# EAGLE board Striain_Gauge_Circuit (EAGLE 9.3.0)
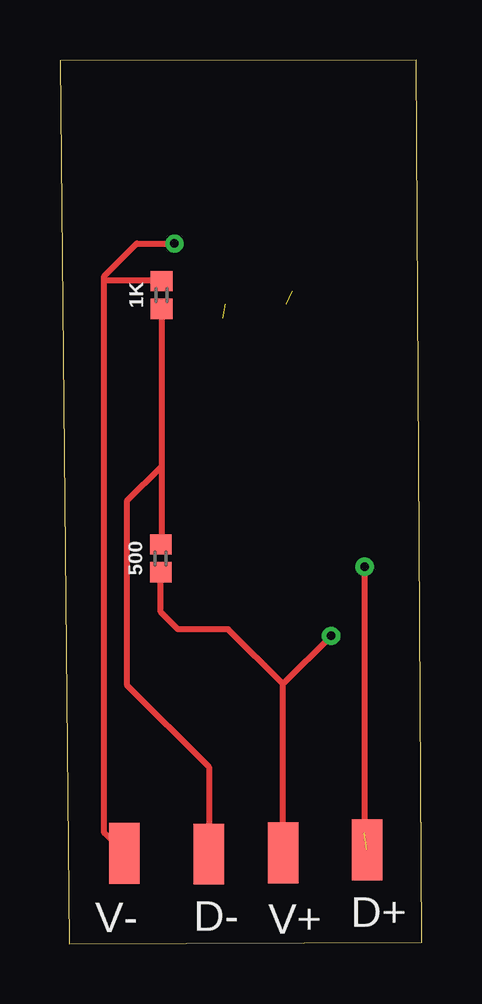
[diagram p0: board, top side]
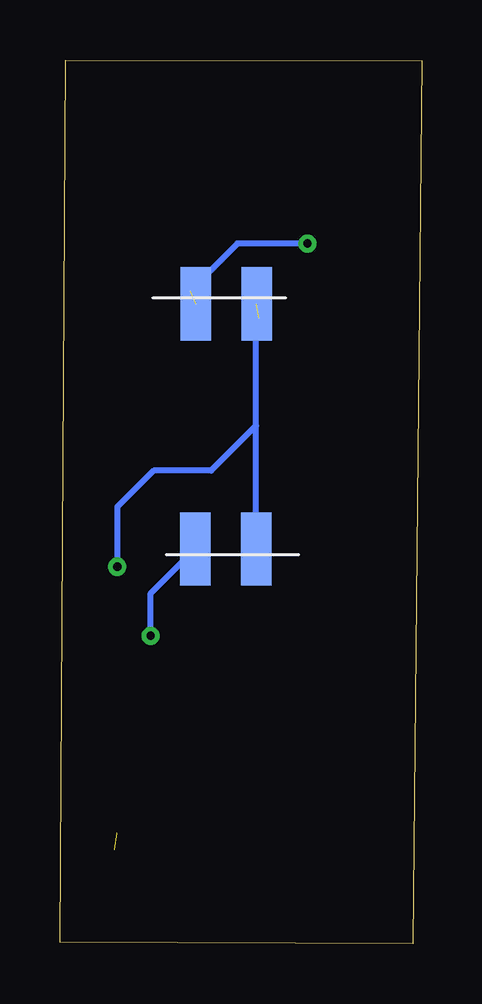
[diagram p1: board, bottom side, seen from below]

Size 15.1 x 36.85 mm. Coordinates in mm from the lower left corner, seen from the top.
Outline: 0.38,0 15.1,0.05 14.87,36.85 0,36.83 0.38,0
Copper layers (1*16): Top 0.035mm / dielectric 1.5mm / Bottom 0.035mm
Design rules "default *": minimum track width 10mil, minimum drill 0.35mm, track to track 6mil, track to pad 6mil, pad to pad 6mil, via to via 6mil, smd to smd 6mil, copper to edge 40mil, drill to drill 6mil, minimum pad ring 10mil, minimum via ring 8mil, stop-mask expansion 4mil, vias tented up to drill 0mil, thermal gap 10mil

## Footprints (pad centres in the part's own frame; a part is rotated, then mirrored left to right if it is on the bottom)
SPARKFUN-RESISTORS_0402:1 = smd 0.85 x 0.9: 1 -0.58,0; 2 0.58,0
SMD1,27-2,54 = smd 1.27 x 2.54: 1 0,0
STRAIN-GAUGE = smd 1.27 x 3.048: 1 -0.762,-5.334; 2 1.778,-5.334

## Placement (x,y rotation side)
1K  R  [SPARKFUN-RESISTORS_0402:1]  4.24,27.05 90 top
500  R  [SPARKFUN-RESISTORS_0402:1]  4.2,16.07 90 top
D+  [SMD1,27-2,54]  12.81,3.92 0 top
D-  [SMD1,27-2,54]  6.21,3.74 0 top
U$3  STRAIN_GAUGE  [STRAIN-GAUGE]  7.68,11.13 180 bottom
U$4  STRAIN_GAUGE  [STRAIN-GAUGE]  8.67,32.01 0 bottom
V+  [SMD1,27-2,54]  2.69,3.78 180 top
V-  [SMD1,27-2,54]  9.3,3.79 0 top

## Library data of the parts
1K 500 U$3 U$4 = Microcontroller
D+ D- V+ V- = wirepad

## Nets
D+: D+.1 U$3.1 U$4.2
D-: 1K.1 500.2 D-.1
V+: 1K.2 U$4.1 V+.1
V-: 500.1 U$3.2 V-.1

## Tracks (layer width: path | path; a pad name or v marks a point on that pad's centre or on a via)
D+  (via drill 0.35)  (2 unrouted)
  Top 0.254: v12.71,15.72 12.71,4.62
  Bottom 0.254: U$3.1 6.92,21.6 | 6.92,21.6 6.92,25.97 6.8,26.09 | 6.92,21.6 8.79,19.73 11.19,19.73 12.71,18.21 v12.71,15.72
D-
  Top 0.254: 1K.1 4.24,19.9 | 4.24,19.9 4.24,16.69 500.2 | 4.24,19.9 2.79,18.46 2.79,10.8 6.21,7.37 D-.1
V+  (via drill 0.35)  (1 unrouted)
  Top 0.254: 4.37,27.76 1K.2 4.21,27.65 1.84,27.65 | V+.1 1.84,4.62 1.84,27.65 | 1.84,27.65 1.84,27.84 3.2,29.19 v4.78,29.19
  Bottom 0.254: v4.78,29.19 7.69,29.19 9.67,27.22
V-  (via drill 0.35)
  Top 0.254: V-.1 9.3,10.83 | 9.3,10.83 v11.31,12.84 | 9.3,10.83 7.02,13.11 4.92,13.11 4.2,13.84 500.1
  Bottom 0.254: v11.31,12.84 11.31,14.61 U$3.2